# EAGLE board Super Inari-Kup (EAGLE 9.7.0)

Size 410.72 x 281.06 mm. Coordinates in mm from the lower left corner, seen from the top.
Outline: 0,0 410.72,0 410.72,281.06 0,281.06 0,0
Copper layers (1*16): Top 0.035mm / dielectric 1.5mm / Bottom 0.035mm
Design rules "default": minimum track width 6mil, minimum drill 0.35mm, track to track 6mil, track to pad 6mil, pad to pad 6mil, via to via 6mil, smd to smd 6mil, copper to edge 40mil, drill to drill 6mil, minimum pad ring 10mil, minimum via ring 8mil, stop-mask expansion 4mil, vias tented up to drill 0mil, thermal gap 10mil

## Footprints (pad centres in the part's own frame; a part is rotated, then mirrored left to right if it is on the bottom)
BATTERY-GENERIC = drill 1.118 pad 3.15 octagon: + 2.54,0; - -2.54,0
MOTOR = drill 1.118 pad 3.15 octagon: + 2.54,0; - -2.54,0
PIEZO = drill 1 pad 1.6: 1 -3.5,0; 2 3.5,0
28015 = drill 1.016 long: 1 -2.54,0; 2 0,0; 3 2.54,0
SENRD254W50D503H320B = drill 0.7 pad 1.3: 1 -1.27,0; 2 1.27,0
RESAD1016W63L850D250B = drill 0.83 pad 1.43: 1 -5.08,0; 2 5.08,0
WS2812-STRIP = drill 1.016 long: 1 -3.81,0; 2 -1.27,0; 3 1.27,0; 4 3.81,0
SG90 = drill 1.016 long: 1 -2.54,0; 2 0,0; 3 2.54,0
SW-200D = drill 0.85 pad 1.45: 1 -7.15,0; 2 7.15,0
TO220V = drill 1.016 long: 1 -2.54,-2.54; 2 0,-2.54; 3 2.54,-2.54
JHD-162A = drill 1.016 long: 1 -19.05,0; 2 -16.51,0; 3 -13.97,0; 4 -11.43,0; 5 -8.89,0; 6 -6.35,0; 7 -3.81,0; 8 -1.27,0; 9 1.27,0; 10 3.81,0; 11 6.35,0; 12 8.89,0; 13 11.43,0; 14 13.97,0; 15 16.51,0; 16 19.05,0
DIP762W53P254L1969H508Q16B = drill 0.743 pad 1.343: 1 -3.81,8.89; 2 -3.81,6.35; 3 -3.81,3.81; 4 -3.81,1.27; 5 -3.81,-1.27; 6 -3.81,-3.81; 7 -3.81,-6.35; 8 -3.81,-8.89; 9 3.81,-8.89; 10 3.81,-6.35; 11 3.81,-3.81; 12 3.81,-1.27; 13 3.81,1.27; 14 3.81,3.81; 15 3.81,6.35; 16 3.81,8.89
TO92 = drill 0.813 octagon: 1 -1.27,0; 2 0,1.905; 3 1.27,0
ARDUINO-UNO-R3-SHIELD = drill 1.016 pad 1.88: 3.3V 24.13,-2.54; 5V 24.13,0; A0 24.13,12.7; A1 24.13,15.24; A2 24.13,17.78; A3 24.13,20.32; A4 24.13,22.86; A5 24.13,25.4; AREF -24.13,-13.97; D2 -24.13,20.32; D3 -24.13,17.78; D4 -24.13,15.24; D5 -24.13,12.7; D6 -24.13,10.16; D7 -24.13,7.62; D8 -24.13,3.81; D9 -24.13,1.27; D10 -24.13,-1.27; D11 -24.13,-3.81; D12 -24.13,-6.35; D13 -24.13,-8.89; GND@0 24.13,2.54; GND@1 24.13,5.08; GND@2 -24.13,-11.43; IOREF 24.13,-7.62; NC 24.13,-10.16; RES 24.13,-5.08; RX -24.13,25.4; SCL -24.13,-19.05; SDA -24.13,-16.51; TX -24.13,22.86; VIN 24.13,7.62

## Placement (x,y rotation side)
BAT1  9V  [BATTERY-GENERIC]  186.59,22.86 270 top
BAT2  9V  [BATTERY-GENERIC]  104.87,8.26 270 top
M1  MOTOR_HDR  [MOTOR]  302.63,107.03 0 top
M2  MOTOR_HDR  [MOTOR]  363.36,177.09 0 top
PIEZO2  PIEZO  [PIEZO]  397.46,130.12 0 top
PING1  DISTANCE-SENSOR-3PIN  [28015]  159.45,215.06 0 top
Q1  PHOTOTRANSISTOR  [SENRD254W50D503H320B]  240.26,273.46 180 top
R1  1k  [RESAD1016W63L850D250B]  318.7,247.72 90 top
RING1  WS2812B_STRIP  [WS2812-STRIP]  402.97,66.48 0 top
SERVO2  SERVOSG90  [SG90]  275.22,139.7 0 top
SERVO3  SERVOSG90  [SG90]  355.37,137.92 0 top
SERVO5  SERVOSG90  [SG90]  358.97,65.12 0 top
SERVO6  SERVOSG90  [SG90]  7.06,212.98 0 top
SERVO8  SERVOSG90  [SG90]  8.66,129.29 0 top
SERVO9  SERVOSG90  [SG90]  86.77,127.3 0 top
TILT1  TILT  [SW-200D]  321.66,228.64 0 top
U1  LM7805_TO220V  [TO220V]  75.17,20.05 0 top
U2  LCD-16X2JHD-162A  [JHD-162A]  226.34,255.71 0 top
U3  L293E  [DIP762W53P254L1969H508Q16B]  228.57,179.83 90 top
U4  TMP36GT9Z_TO92  [TO92]  86.76,180.95 0 top
UBRAIN  ARDUINO-UNO-R3-SHIELD  [ARDUINO-UNO-R3-SHIELD]  222.55,123.22 270 top

## Library data of the parts
BAT1 BAT2 M1 M2 PIEZO2 PING1 Q1 R1 RING1 SERVO2 SERVO3 SERVO5 SERVO6 SERVO8 SERVO9 TILT1 U1-U4 UBRAIN = Tinkercad

## Nets
BAT1+: BAT1.+ U3.8
BAT2+: BAT2.+ U1.1
BAT2-: BAT1.- BAT2.- PIEZO2.2 PING1.1 Q1.1 RING1.3 SERVO2.1 SERVO3.1 SERVO5.1 SERVO6.1 SERVO8.1 SERVO9.1 TILT1.2 U1.2 U2.1 U2.3 U2.5 U2.16 U3.4 U3.5 U3.12 U3.13 U4.1 UBRAIN.GND@0 UBRAIN.GND@1 UBRAIN.GND@2
M1_+: M1.+ U3.3
M1_-: M1.- U3.6
M2_+: M2.+ U3.11
M2_-: M2.- U3.14
SERVO6_PWR: SERVO2.2 SERVO6.2 SERVO8.2 SERVO9.2 U1.3
U2_LED+: R1.2 U2.15
UBRAIN_5V: PING1.2 R1.1 RING1.2 SERVO3.2 SERVO5.2 U2.2 U3.16 U4.3 UBRAIN.5V
UBRAIN_A0: SERVO5.3 UBRAIN.A0
UBRAIN_A1: SERVO8.3 UBRAIN.A1
UBRAIN_A2: SERVO3.3 SERVO6.3 UBRAIN.A2
UBRAIN_A4: U4.2 UBRAIN.A4
UBRAIN_A5: PIEZO2.1 UBRAIN.A5
UBRAIN_D2: U2.14 U3.15 UBRAIN.D2
UBRAIN_D3: U2.13 U3.1 UBRAIN.D3
UBRAIN_D4: U2.12 U3.10 UBRAIN.D4
UBRAIN_D5: U2.11 U3.9 UBRAIN.D5
UBRAIN_D6: SERVO2.3 UBRAIN.D6
UBRAIN_D7: TILT1.1 U3.7 UBRAIN.D7
UBRAIN_D8: RING1.1 U3.2 UBRAIN.D8
UBRAIN_D9: PING1.3 UBRAIN.D9
UBRAIN_D10: SERVO9.3 UBRAIN.D10
UBRAIN_D11: U2.6 UBRAIN.D11
UBRAIN_D12: U2.4 UBRAIN.D12
UBRAIN_D13: Q1.2 UBRAIN.D13

## Tracks (layer width: path | path; a pad name or v marks a point on that pad's centre or on a via)
BAT1+  (1 unrouted)
BAT2+  (1 unrouted)
BAT2-  (25 unrouted)
M1_+  (1 unrouted)
M1_-  (1 unrouted)
M2_+  (1 unrouted)
M2_-  (1 unrouted)
SERVO6_PWR  (4 unrouted)
U2_LED+  (1 unrouted)
UBRAIN_5V  (8 unrouted)
UBRAIN_A0  (1 unrouted)
UBRAIN_A1  (1 unrouted)
UBRAIN_A2  (2 unrouted)
UBRAIN_A4  (1 unrouted)
UBRAIN_A5  (1 unrouted)
UBRAIN_D2  (2 unrouted)
UBRAIN_D3  (2 unrouted)
UBRAIN_D4  (2 unrouted)
UBRAIN_D5  (2 unrouted)
UBRAIN_D6  (1 unrouted)
UBRAIN_D7  (2 unrouted)
UBRAIN_D8  (2 unrouted)
UBRAIN_D9  (1 unrouted)
UBRAIN_D10  (1 unrouted)
UBRAIN_D11  (1 unrouted)
UBRAIN_D12  (1 unrouted)
UBRAIN_D13  (1 unrouted)